# Altium PCB PCB_Sensor.PcbDoc
Units mm, origin at the board's own origin, x right, y up, seen from the top; angles counter-clockwise.
Board outline 28 x 28 mm, 2 copper layers (Top Layer, Bottom Layer); 7 components, 42 nets, 18 pads, 1 vias.
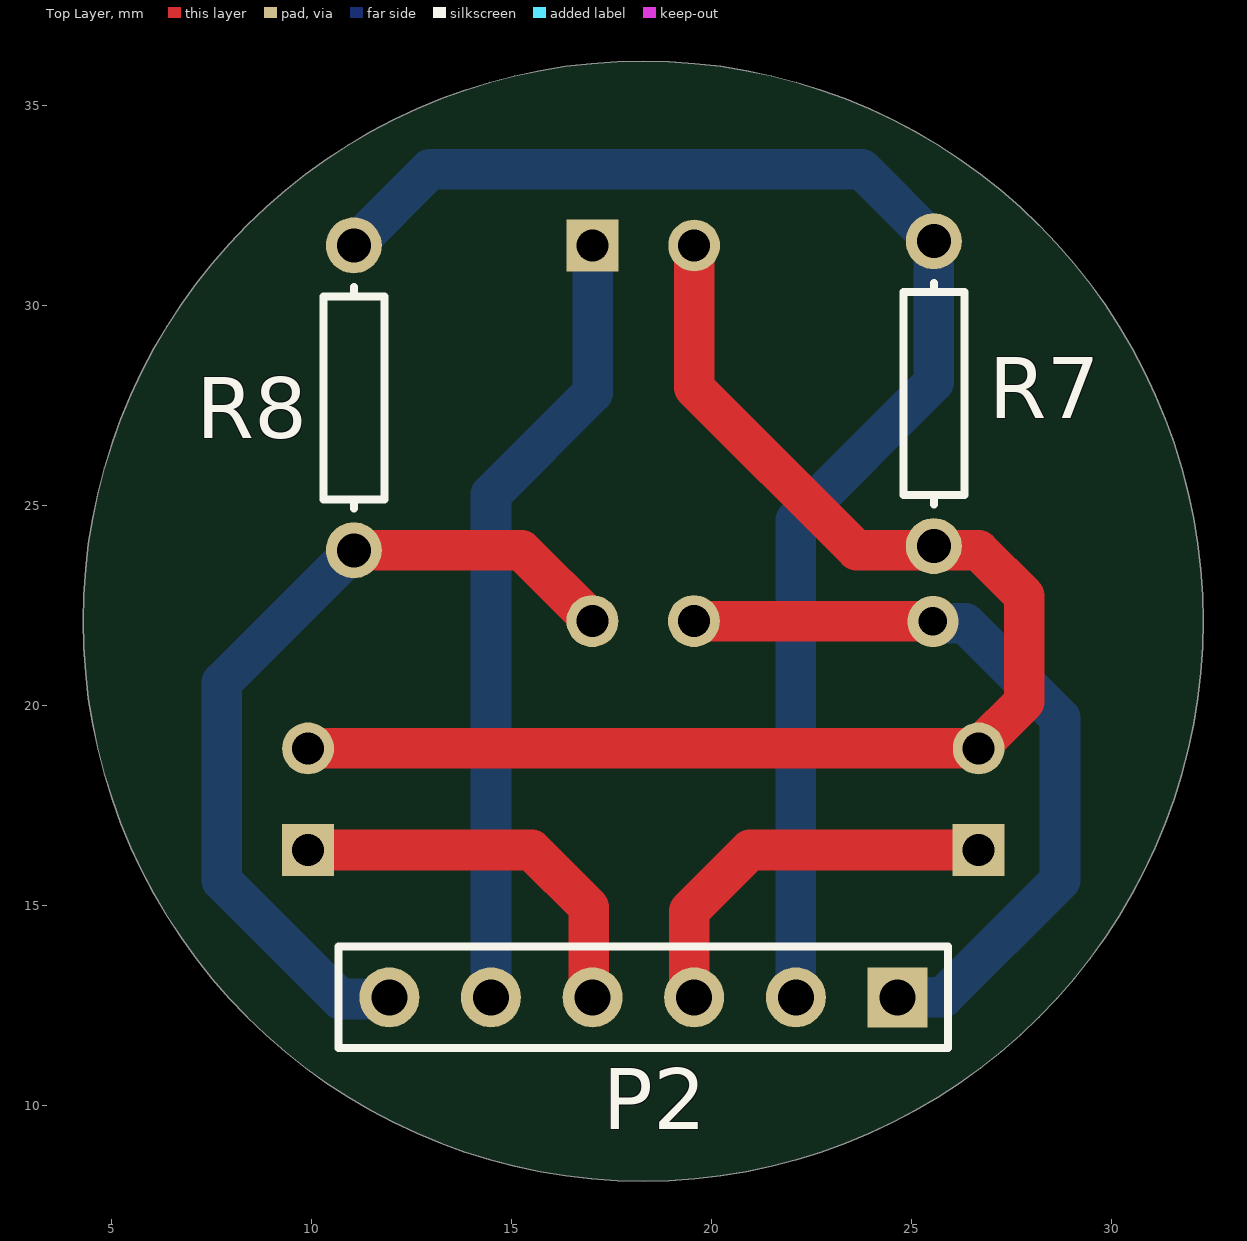
[diagram p0: Top Layer view]
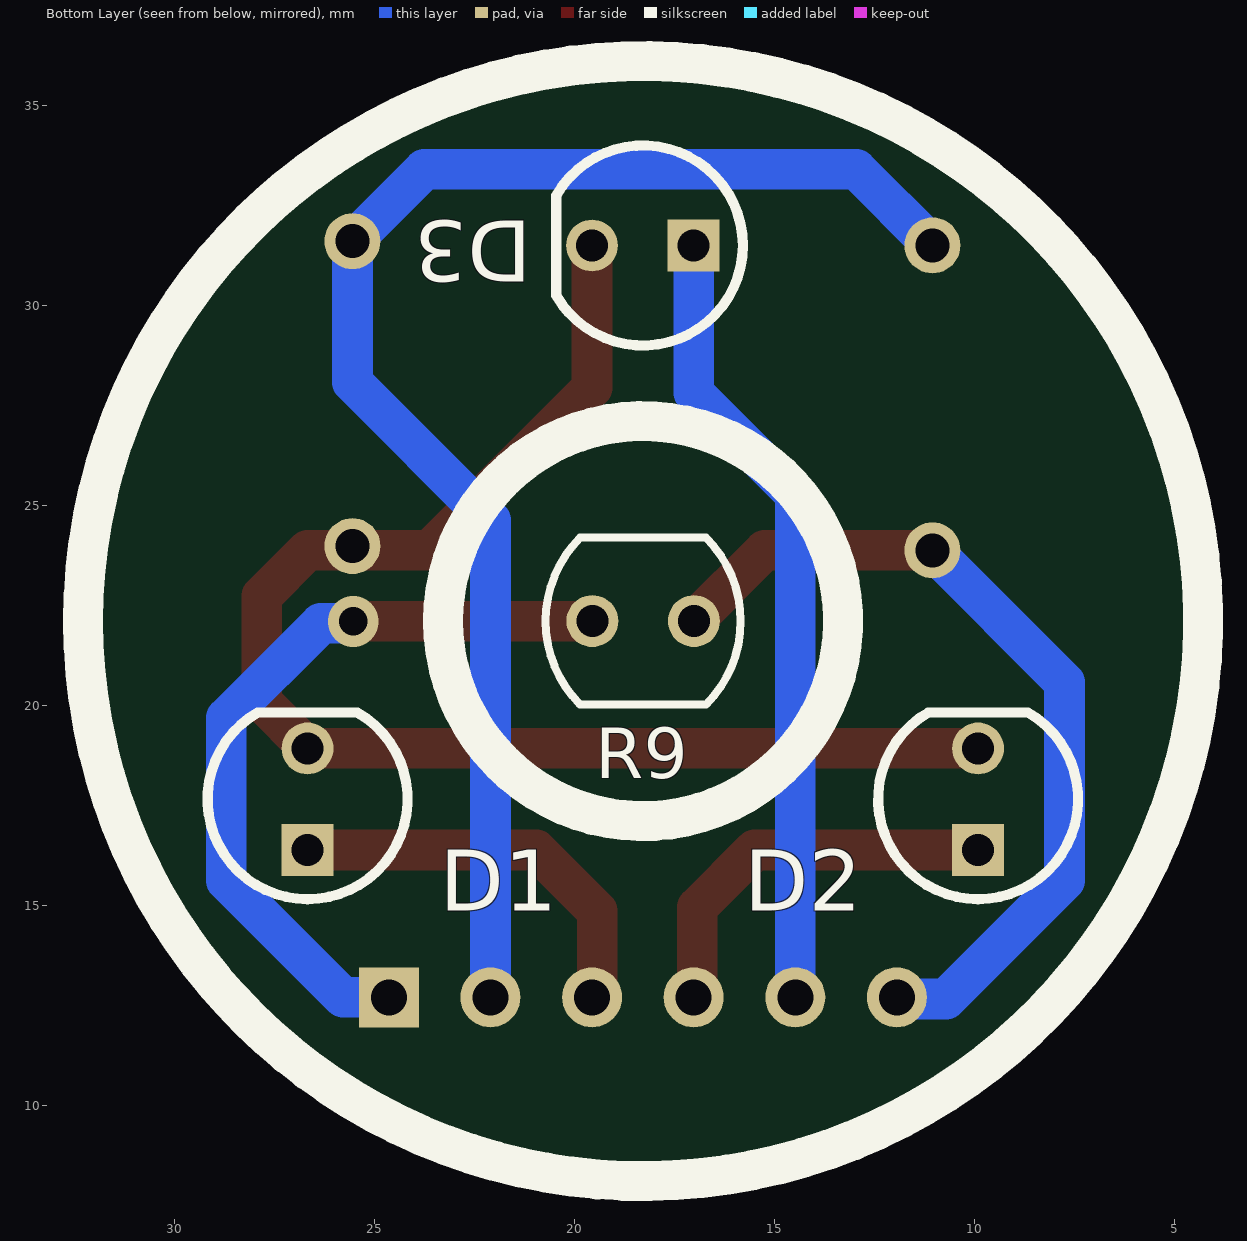
[diagram p1: Bottom Layer view, seen from below]
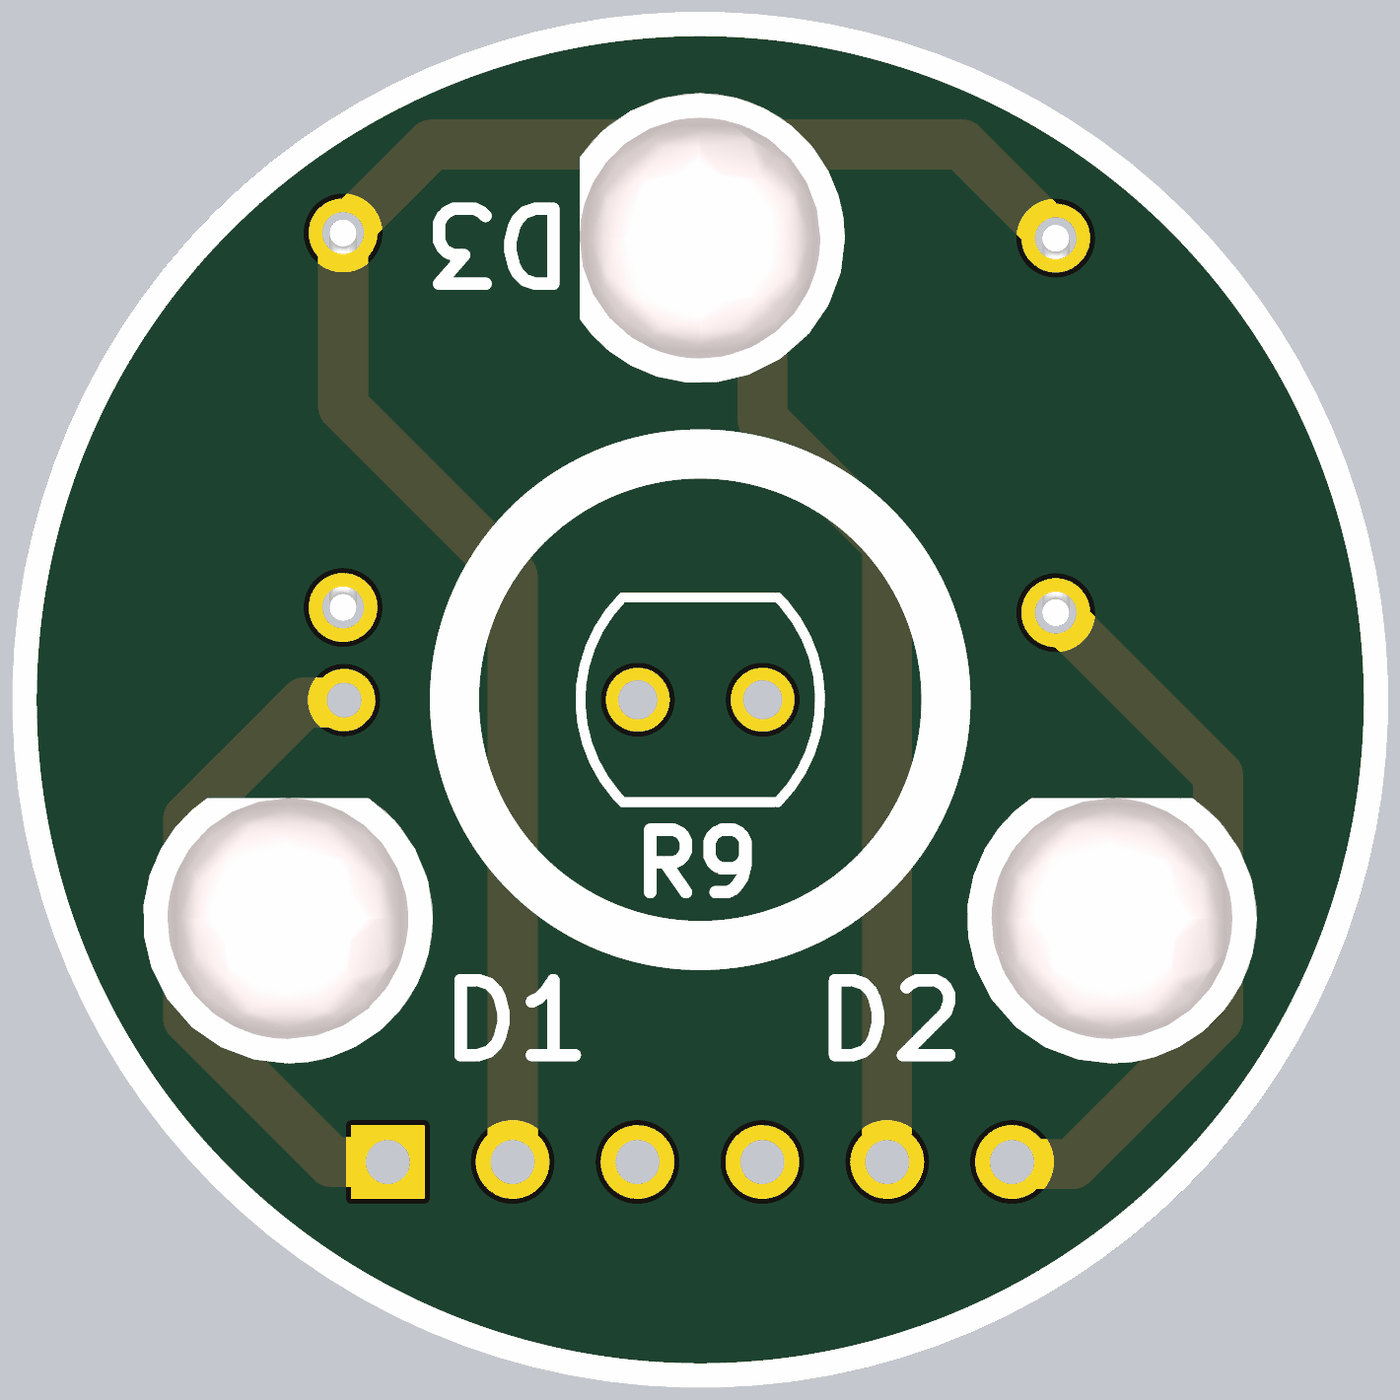
[diagram p2: 3D render of the assembled board from below, using the file's embedded part models]

## Layer stack, top to bottom
Top Solder: solder mask 0.0102, Solder Resist, Dk 3.5
Top Layer: signal copper 0.0356
Dielectric 1: dielectric 0.32, FR-4, Dk 4.8
Bottom Layer: signal copper 0.0356
Bottom Solder: solder mask 0.0102, Solder Resist, Dk 3.5

## Board outline
18.281,8.105 cw(c18.281,22.105) 4.281,22.105 cw(c18.281,22.105) 18.281,36.105 cw(c18.281,22.105) 32.281,22.105 cw(c18.281,22.105)

## Design rules (kind name [scope] priority, off if disabled: settings)
Clearance [All] p1: gap=0.254 ignorepadtopadclearanceinfootprint=FALSE except(0: Arc-Hole Track-Hole SMDPad-Hole THPad-Hole Via-Hole Fill-Hole Poly-Hole Region-Hole Text-Hole)
PolygonConnect [All] p1: connectstyle=Relief reliefconductorwidth=0.254 reliefentries=4 polygonreliefangle="90 Angle" airgapwidth=0.254
RoutingVias [All] p1: holewidth=0.711 width=1.27 viastyle="Through Hole" minholewidth=0.711 minwidth=1.27 maxholewidth=0.711 maxwidth=1.27
SilkToSolderMaskClearance [IsText] p1: minsilkscreentomaskgap=0.254 clearancetoexposedcopper=TRUE
SolderMaskExpansion [All] p1: expansion=0.102 istentingtop=FALSE
Width [All] p1: maxlimit=1.27 minlimit=0.762 preferedwidth=1.016 minimp=50.000000 maximp=50.000000 favimp=50.000000
29 further rules are at their usual default settings.

## Classes and differential pairs
component class Sheet_Sensor: D2 D3 P2 R8 R9

## Components (designator, comment, footprint, x,y, rotation, side; value= is the part's Value field where it differs from the comment)
D1 "B" LED 26.67,17.653 r90 bottom
D2 "G" LED 9.906,17.653 r90 bottom
D3 "R" LED 18.288,31.496 r0 bottom
P2 "SENSOR" HDR1X6 24.638,12.7 r180 top
R7 "Res1" RES 25.548,27.792 r270 top value=1K
R8 "10K" RES 11.049,27.686 r270 top
R9 "LDR" LDR 18.281,22.105 r180 bottom

## Footprints (in the part's own frame and the unit in brackets; to place one, negate y for a bottom-side part, rotate by r counter-clockwise, add the part's x,y. Pads: shape width x height; smd on the part's side, far side on the other; paste and mask are expansions set on the pad)
HDR1X6 [mm] "Connector; Header; 6 Position"
  rect 1.5x1.5 hole 0.9: 1(0,0)
  round 1.5 hole 0.9: 2(2.54,0) 3(5.08,0) 4(7.62,0) 5(10.16,0) 6(12.7,0)
  silkscreen extent -1.27,-1.27 13.97,1.27
LDR [mm] "THD, 2-Leads, Body Width 4.17mm (Max), Height 2.29mm"
  round 1.3 hole 0.8: 1(-1.27,0) 2(1.27,0)
  silkscreen extent -2.44,-2.08 2.44,2.08, body extent -2.44,-2.09 2.44,2.09, height 8.62
LED [mm] "5mm"
  rect 1.3x1.3 hole 0.8: 1(-1.27,0)
  round 1.295 hole 0.8: 2(1.27,0)
  silkscreen extent -2.5,-2.5 2.17,2.5, body extent -2.95,-2.95 2.45,2.95, height 11.6
RES [mm] "Axial Device, Thru-Hole; 2 Leads; 0.3 in Pin Spacing"
  round 1.4 hole 0.85: 1(-3.81,0) 2(3.81,0)
  silkscreen extent -2.77,-0.76 2.77,0.76, body extent -4.08,-1.17 4.09,1.17, height 2.97

## Part data
D1 D2 D3: library part LED1, "Typical RED GaAs LED", LatestRevisionDate=08-Jul-2005, LatestRevisionNote="Mech Layer 1 removed.", PackageDescription="LED; 2 Leads", PackageReference=LED-1, Published=8-Jun-2000, Publisher="Altium Limited"
P2: library part "Header 6", "Header, 6-Pin", LatestRevisionDate=17-Jul-2002, LatestRevisionNote="Re-released for DXP Platform.", Publisher="Altium Limited"
R7: "Resistor", LatestRevisionDate=17-Jul-2002, LatestRevisionNote="Re-released for DXP Platform.", PackageDescription="Axial Device, Thru-Hole; 2 Leads; 0.3 in Pin Spacing", PackageReference=AXIAL-0.3, Published=8-Jun-2000, Publisher="Altium Limited"
R8: library part Res1, "Resistor", LatestRevisionDate=17-Jul-2002, LatestRevisionNote="Re-released for DXP Platform.", PackageDescription="Axial Device, Thru-Hole; 2 Leads; 0.3 in Pin Spacing", PackageReference=AXIAL-0.3, Published=8-Jun-2000, Publisher="Altium Limited"
R9: "Photoconductive Resistor, 200 kOhm, 100 V, 80 mW, -40 to 75 degC, 2-Pin THD, RoHS", Dark Resistance=200kohm, Manufacturer="Excelitas Technology", Operating Temperature Max=75°C, Operating Temperature Min=-40°C, Package Description="2-Pin Through Hole Device, Body Width 4.17 mm (Max), Height 2.29 mm", Package Reference=VT90N1, Power Rating=80mW, Resistance @ Lux=12kohm, Resistor Case Style=-, Voltage Rating=100V, Datasheet URL=http://datasheet.octopart.com/VT90N1-Excelitas-datasheet-10388451.pdf, Datasheet Version=09/2006, Manufacturer URL=http://www.excelitas.com/Pages/Index.aspx, Mounting Technology=ThroughHole, Packaging=Each, Product Range=-, SVHC=Cadmiumchloride(15-Jun-2015)

## Via types
v1: diameter 1.27, hole 0.711, Top Layer to Bottom Layer, 1 vias

## Nets (pads, with @x,y where several pads share a name; then routed paths per layer and width w, separated by ;. In a path a pad name is that pad's centre, name@x,y a point inside that pad or via, vN(x,y) a via of type N, cw(c..) or ccw(c..) an arc to the next point about the centre after c; other vN are vias at no path point)
+5: 
GND: 
Net*_1: 
Net*_2: 
NetC1_1: 
NetC2_1: 
NetC3_2: 
NetD1_1: D1.1 P2.3 | length 10.2
  Top Layer w1.016: P2.3 19.465,12.793 19.465,13.135 19.431,13.169 19.431,14.859 20.955,16.383 D1.1
  Bottom Layer w1.016: P2.3@19.487,12.771 P2.3
NetD1_2: D1.2 D2.2 D3.2 R7.2 | length 35.2
  Top Layer w1.016: D2.2 D1.2 26.67,18.946 27.813,20.089 27.813,22.733 26.67,23.876 25.758,23.876 25.652,23.982 R7.2 25.475,23.908 25.203,23.908 25.171,23.876 23.622,23.876 19.558,27.94 D3.2
  Bottom Layer w1.016: R7.2@25.548,23.878 R7.2
NetD2_1: D2.1 P2.4 | length 10
  Top Layer w1.016: D2.1 15.494,16.383 16.925,14.952 16.925,12.793 P2.4
  Bottom Layer w1.016: P2.4 P2.4@17.111,12.793
NetD3_1: D3.1 P2.5 | length 19.9
  Top Layer w1.016: P2.5 P2.5@14.499,12.721
  Bottom Layer w1.016: P2.5 14.478,25.273 17.018,27.813 D3.1
NetP1_3: 
NetP1_4: 
NetP1_5: 
NetP1_6: 
NetP2_1: P2.1 R9.1 | length 19.8
  Top Layer w1.016: R9.1 19.555,22.101 25.524,22.101 v1(25.527,22.098) ; P2.1 P2.1@24.864,12.474
  Bottom Layer w1.016: R9.1 R9.1@19.554,22.102 ; P2.1 25.781,12.7 28.702,15.621 28.702,19.685 26.338,22.049 25.576,22.049 v1(25.527,22.098)
NetP2_2: P2.2 R7.1 R8.1 | length 36.5
  Top Layer w1.016: P2.2 P2.2@22.119,12.721
  Bottom Layer w1.016: R8.1@11.153,31.496 R8.1 12.954,33.401 23.749,33.401 R7.1 25.548,28.075 22.098,24.624 P2.2
NetP2_6: P2.6 R8.2 R9.2 | length 21.8
  Top Layer w1.016: R8.2 15.24,23.876 R9.2
  Bottom Layer w1.016: R8.2 7.747,20.574 7.747,15.621 10.711,12.657 11.895,12.657 P2.6
NetP3_1: 
NetP3_2: 
NetP3_3: 
NetP3_4: 
NetP3_5: 
NetP3_6: 
NetP3_7: 
NetP4_3: 
NetP4_4: 
NetP4_5: 
NetP4_6: 
NetP4_7: 
NetP4_8: 
NetQ1_2: 
NetQ1_3: 
NetQ2_2: 
NetQ2_3: 
NetR1_1: 
NetR1_2: 
NetR2_1: 
NetR2_2: 
NetR3_2: 
NetRGB1_2: 
VS+: 

## Silkscreen, mask and mechanical layers (free items; w line width, h text height)
Bottom Overlay:
  circle w1: c18.282,22.105 r14
  circle w1: c18.282,22.105 r5